# Altium PCB t40MCUPCB.PcbDoc
Units mil, origin at the board's own origin, x right, y up, seen from the top; angles counter-clockwise.
Board outline 3450 x 4000 mil, 4 copper layers (Top Layer, GND, VDD, Bottom Layer), stack 33.556 mil thick; 49 components, 37 nets, 221 pads, 91 vias.
Unrouted connection lines stored in the file: 48.
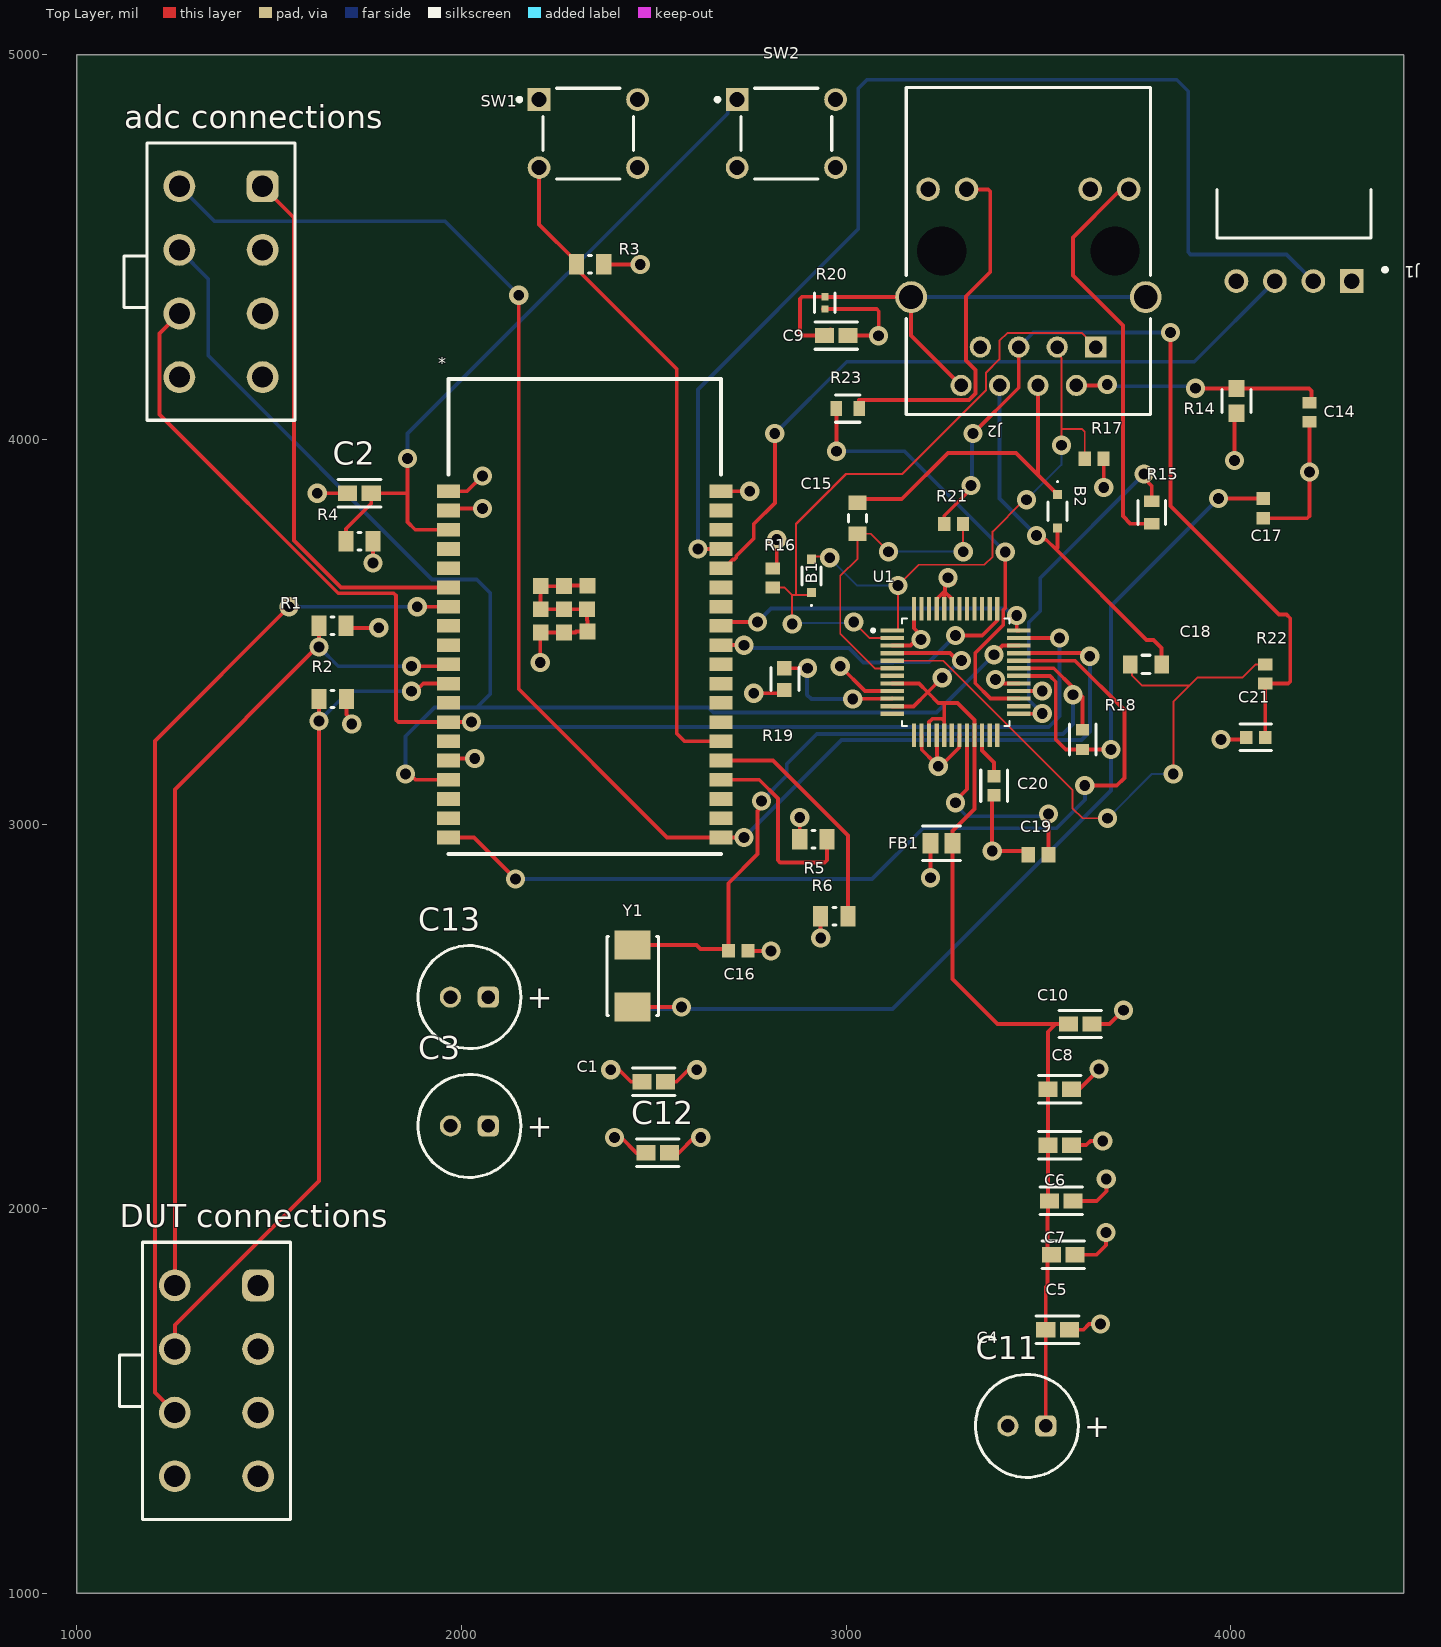
[diagram p0: Top Layer view]
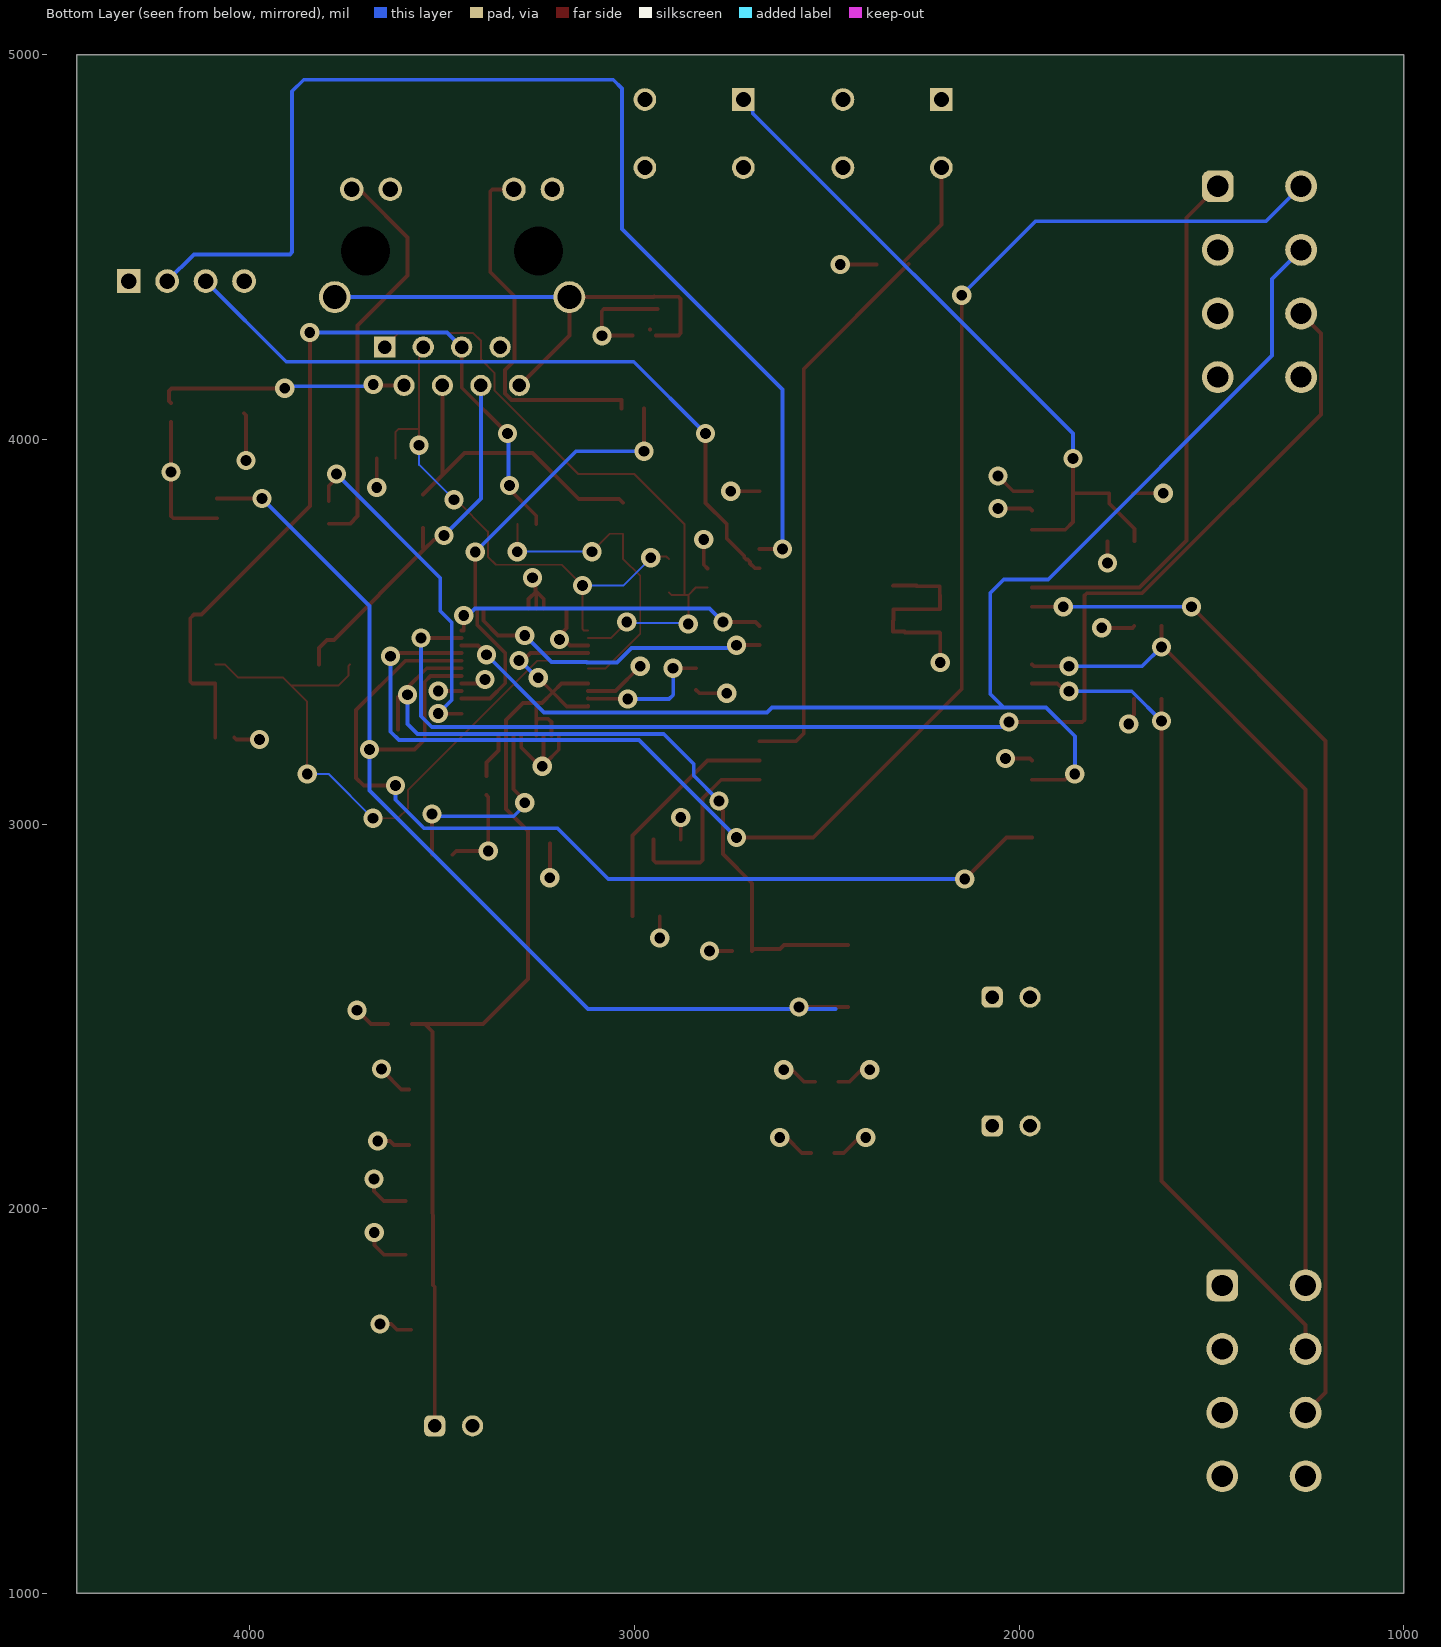
[diagram p1: Bottom Layer view, seen from below]
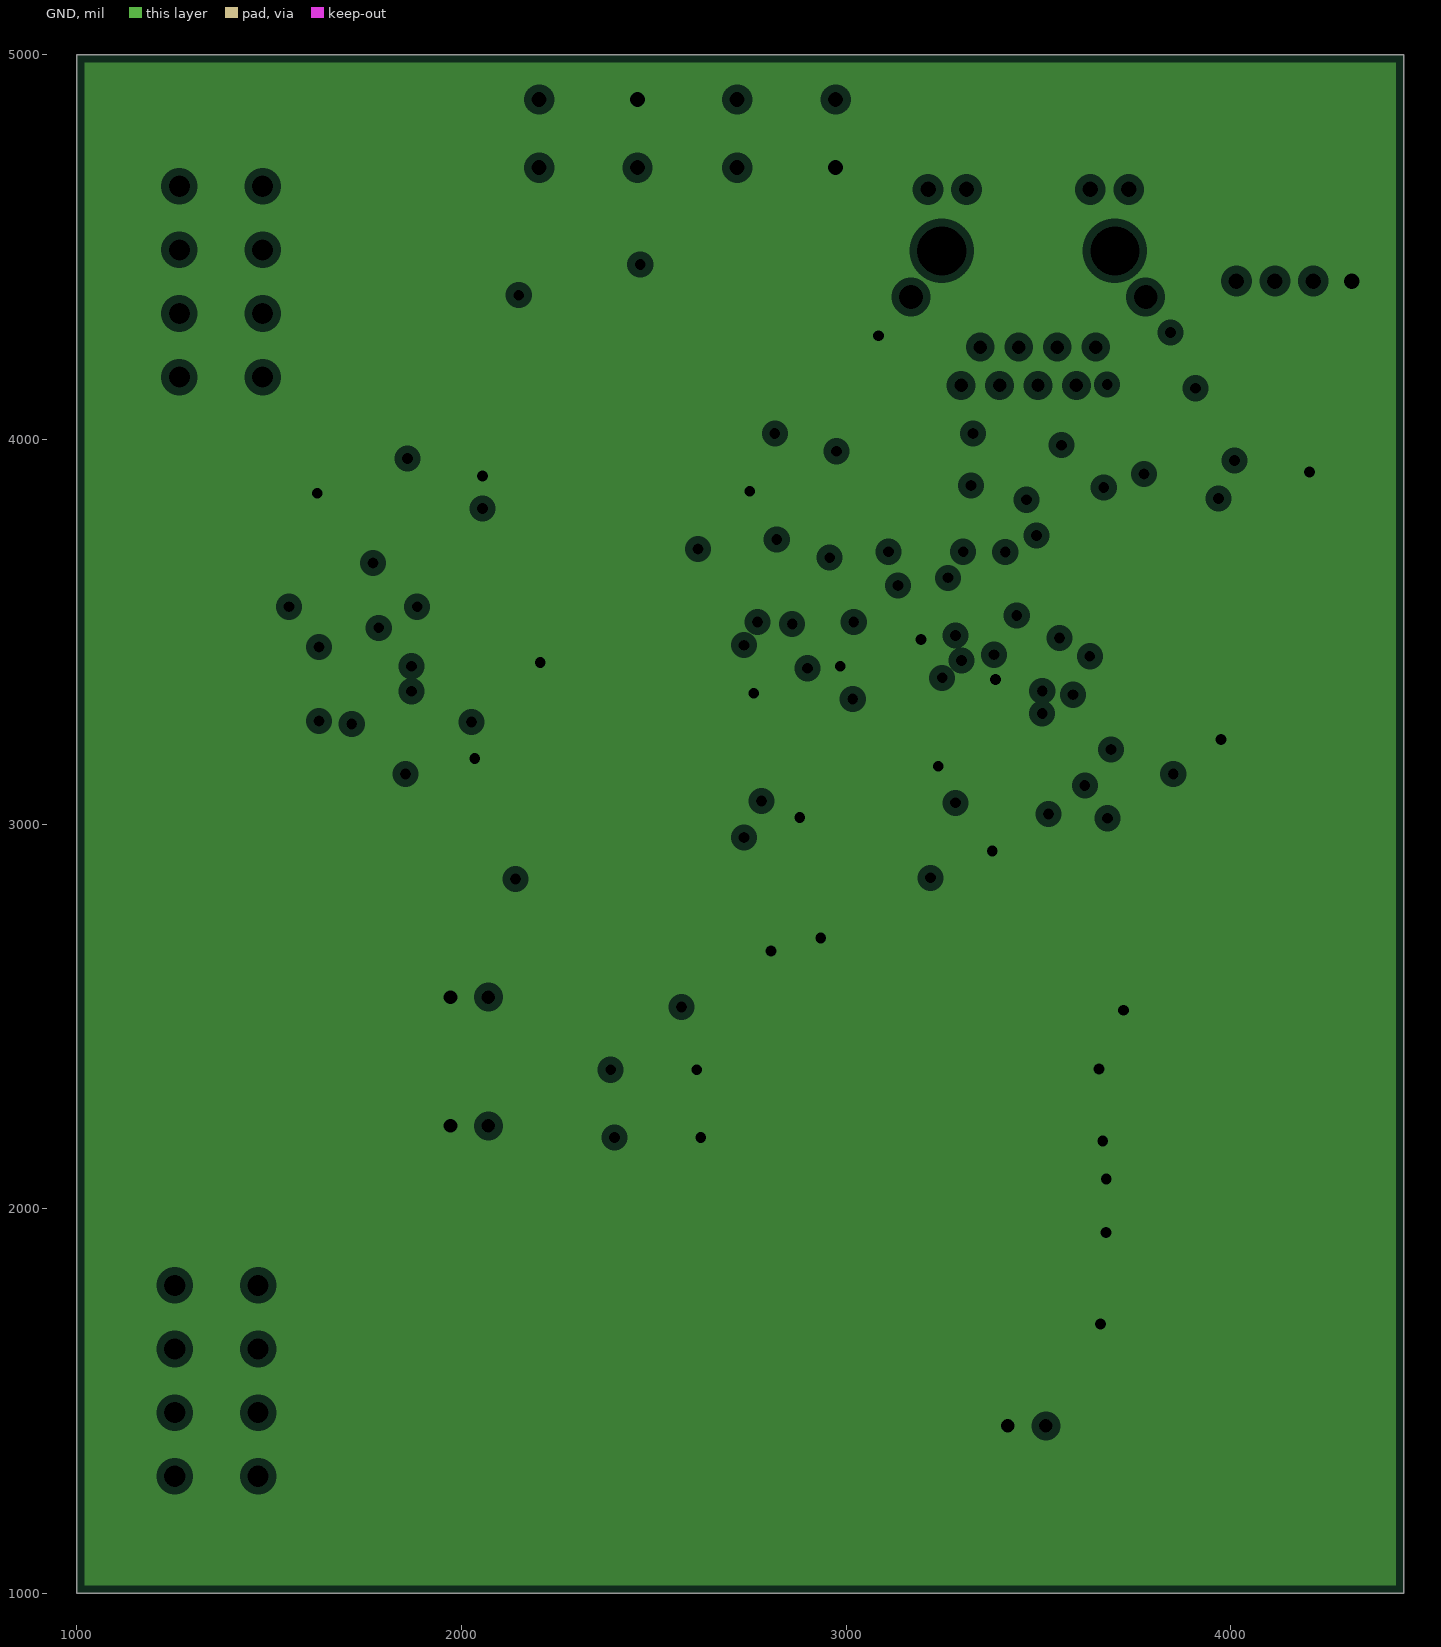
[diagram p2: GND, clearances drawn from the general rule]
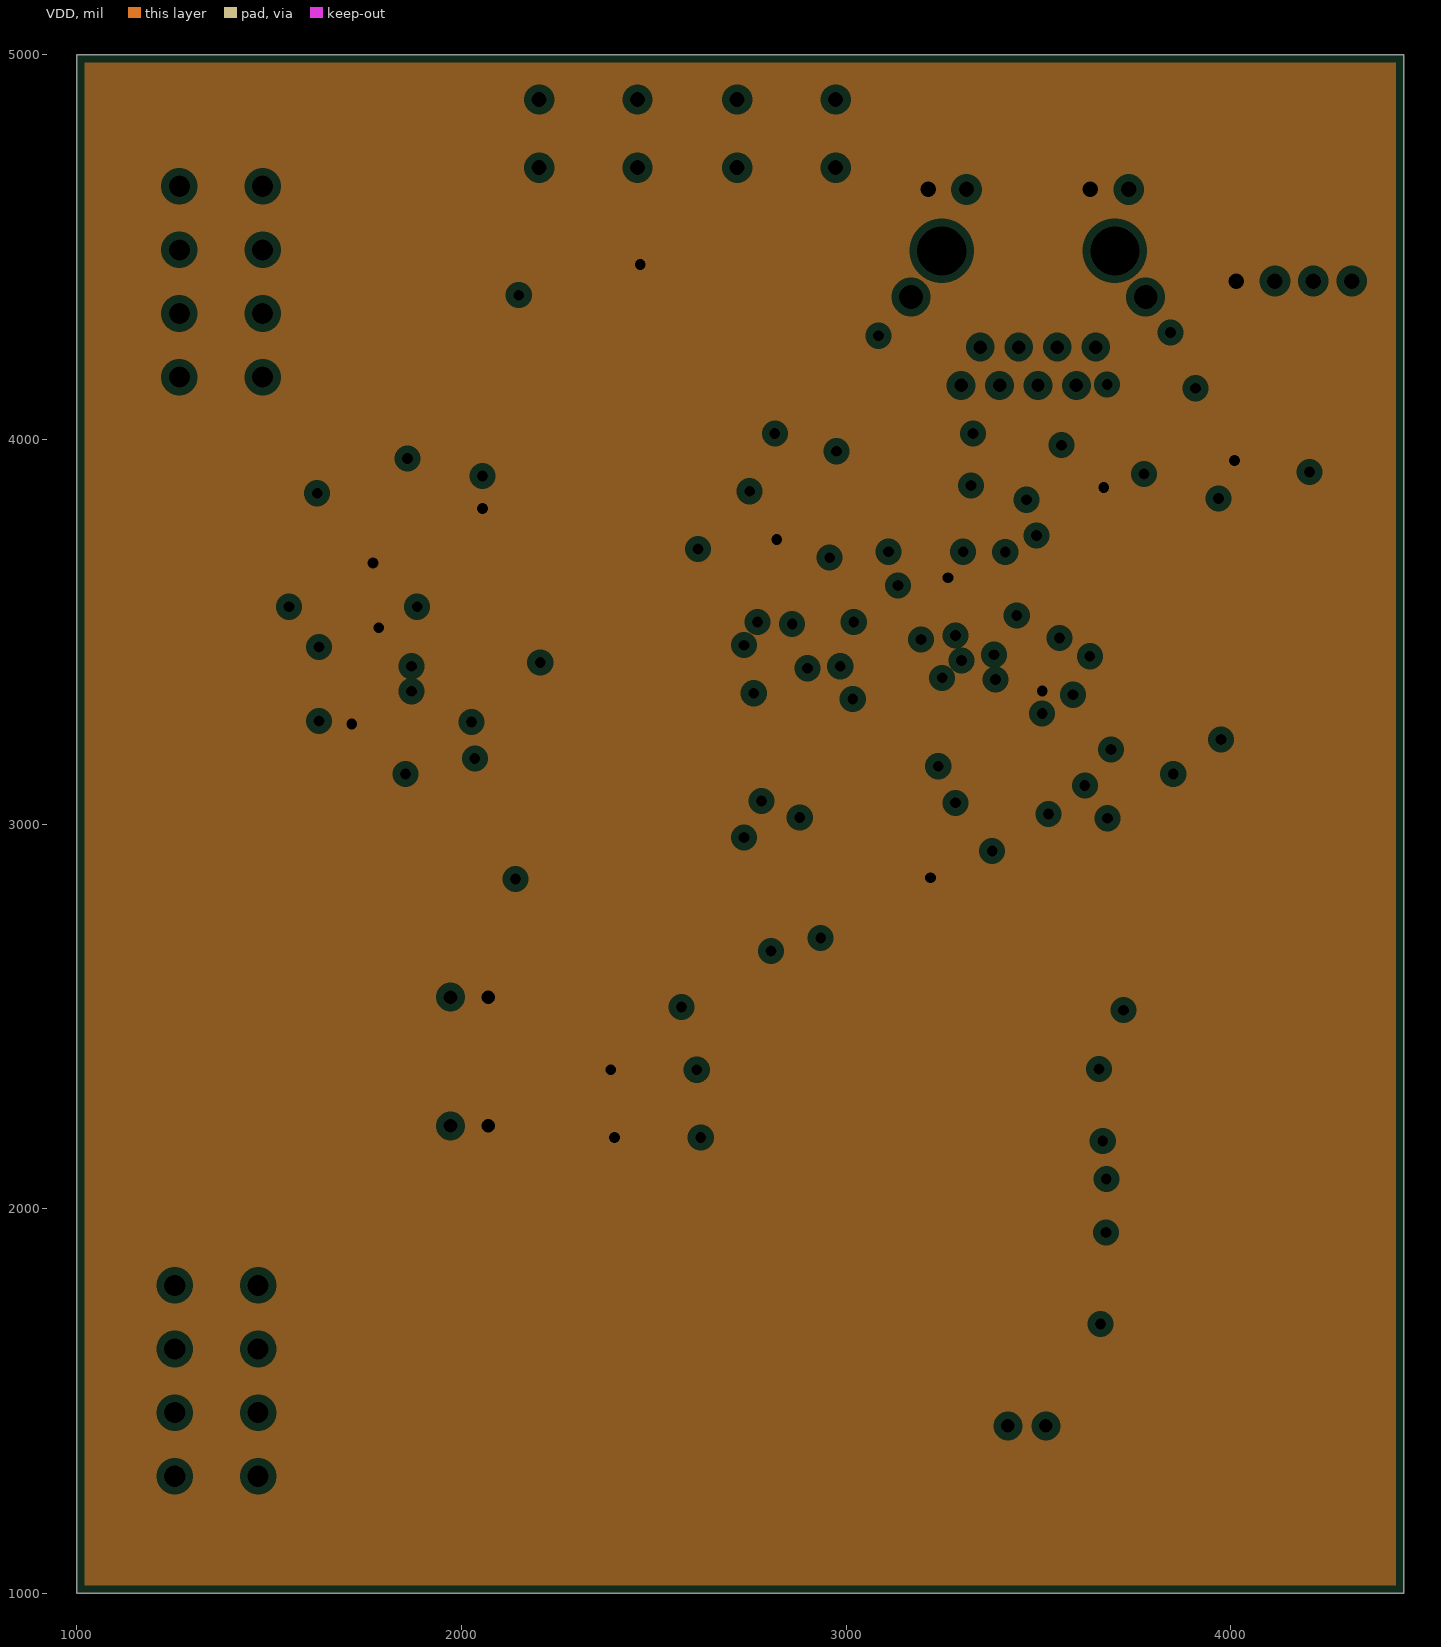
[diagram p3: VDD, clearances drawn from the general rule]
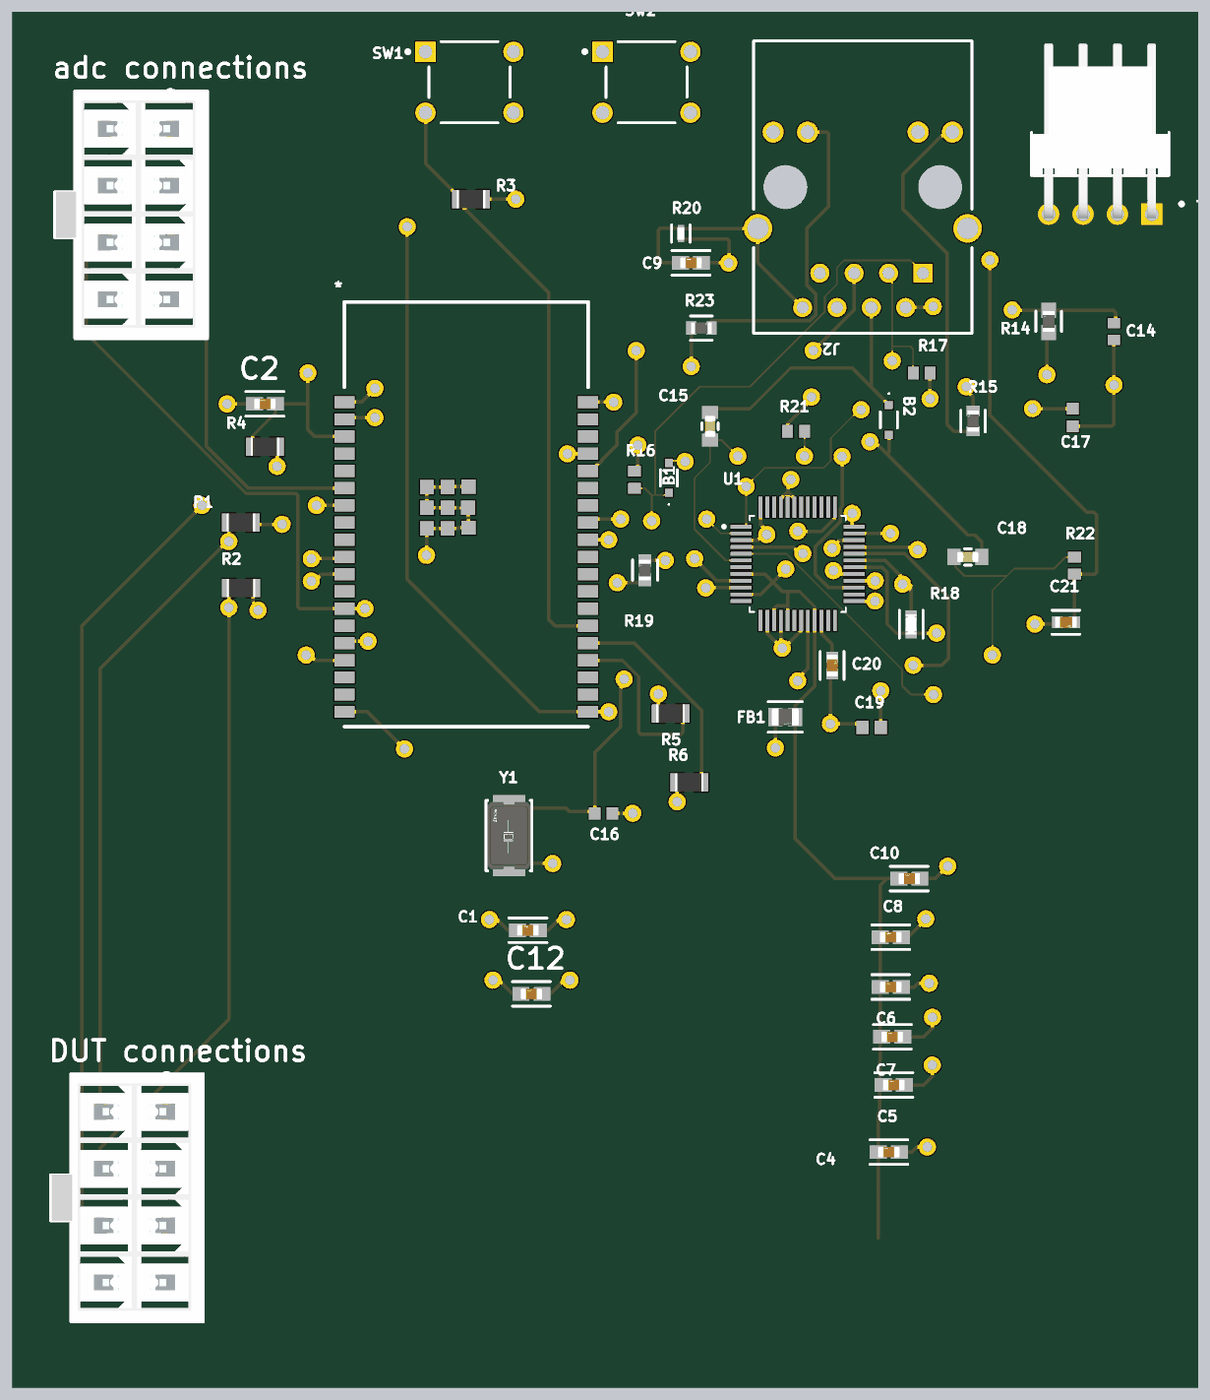
[diagram p4: 3D render of the assembled board from above, using the file's embedded part models]

## Layer stack, top to bottom
Top Solder: solder mask 0.4, Solder Resist, Dk 3.5
Top Layer: signal copper 1.4
Dielectric4: dielectric 12.6, FR-4, Dk 4.8
GND: plane copper 1.378, net GND
Dielectric 1: dielectric 12.6, FR-4, Dk 4.8
VDD: plane copper 1.378, net 3V3
Dielectric 3: prepreg 2.8, PP-006, Dk 4.1
Bottom Layer: signal copper 1.4
Bottom Solder: solder mask 0.4, Solder Resist, Dk 3.5

## Board outline
1000,1000 4450,1000 4450,5000 1000,5000

## Design rules (kind name [scope] priority, off if disabled: settings)
Clearance [All] p1: gap=5 ignorepadtopadclearanceinfootprint=FALSE
DiffPairsRouting [All] p1: maxlimit=10 minlimit=5 mostfreqgap=5 toplayer_minwidth=5 toplayer_maxwidth=20 toplayer_prefwidth=5 bottomlayer_minwidth=5 bottomlayer_maxwidth=20 bottomlayer_prefwidth=5 maxuncoupledlength=500
HoleSize [All] p1: absolutevalues=TRUE maxlimit=250 minlimit=10 maxpercent=80.000 minpercent=20.000
PlaneClearance [All] p1: clearance=20
PlaneConnect [All] p1: planeconnectstyle=Relief reliefexpansion=20 reliefentries=4 reliefconductorwidth=10 reliefairgap=10
PolygonConnect [All] p1: connectstyle=Relief reliefconductorwidth=10 reliefentries=4 polygonreliefangle="90 Angle" airgapwidth=10
RoutingVias [All] p1: holewidth=28 width=50 viastyle="Through Hole" minholewidth=28 minwidth=50 maxholewidth=28 maxwidth=50
SolderMaskExpansion [All] p1: expansion=4 istentingtop=FALSE
Width [All] p1: maxlimit=1000 minlimit=5 preferedwidth=10
26 further rules are at their usual default settings.

## Classes and differential pairs
differential pair ETH.TX: +ETH.TX_P -ETH.TX_N
differential pair ETH.RX: +ETH.RX_P -ETH.RX_N

## Components (designator, comment, footprint, x,y, rotation, side; value= is the part's Value field where it differs from the comment)
* "ESP 32 WROVER" PCBComponent_1 1966.34,3865 r0 top
"adc connections" "64900821122" 64900821122 1375,4410 r90 top
B1 "PESD5V0U1BA_115" PESD5V0U1BA115 2910,3645 r90 top
B2 "PESD5V0U1BA_115" PESD5V0U1BA115 3550,3813.31 r270 top
C1 "0.1 uF" FP-CC0603-DA-IPC_A 2500,2330 r0 top
C2 "0.1 uF" FP-CC0603-DA-IPC_A 1735,3860 r0 top
C3 "10 uF" WCAP-HTG5_D6.3H8 52020.79,52215 r0 top
C4 "0.1 uF" FP-CC0603-DA-IPC_A 3550,1685 r0 top
C5 "0.1 uF" FP-CC0603-DA-IPC_A 3564.41,1880 r0 top
C6 "0.1 uF" FP-CC0603-DA-IPC_A 3555.59,2165 r0 top
C7 "0.1 uF" FP-CC0603-DA-IPC_A 3560,2020 r0 top
C8 "0.1 uF" FP-CC0603-DA-IPC_A 3555.59,2310 r0 top
C9 "0.1 uF" FP-CC0603-DA-IPC_A 2974.41,4270 r0 top
C10 "0.1 uF" FP-CC0603-DA-IPC_A 3609.41,2480 r0 top
C11 "10 uF" WCAP-HTG5_D6.3H8 53470.2,51435.02 r0 top
C12 "0.1 uF" FP-CC0603-DA-IPC_A 2510.35,2145.03 r0 top
C13 "10 uF" WCAP-HTG5_D6.3H8 52020.79,52550 r0 top
C14 "0.022 uF" CAPC1608X92X38LL15T08 4205,4070.39 r90 top
C15 "6.8 nF" FP-CGA3E-0_3-0_1-IPC_A 3030,3795 r90 top
C16 "18 pF" CAPC1608X90X35LL15T15 2720,2670 r0 top
C17 "18 pF" CAPC1608X90X35LL15T15 4085,3820.59 r90 top
C18 "6.8 nF" FP-CGA3E-0_3-0_1-IPC_A 3780,3415 r0 top
C19 "4.7 uF" CAPC1608X87X35NL15T15 3500,2920 r0 top
C20 "10 nF" FP-0603-L_1_6_0_15-W_0_81-IPC_C 3385,3099.64 r90 top
C21 "10 nF" FP-0603-L_1_6_0_15-W_0_81-IPC_C 4065.36,3225.28 r0 top
"DUT connections" "64900821122" 64900821122 1363.27,1552.32 r90 top
FB1 "BLM21PG121SN1D" FP-BLM21-0_2-t0_85-e0_5-d-IPC_C 3248.57,2950 r0 top
J1 "22-05-3041" FP-22-05-3041-MFG 4165,4690 r180 top
J2 "SI-60062-F" BELF-SI-60062-F_V 3474.17,4490.16 r180 top
R1 "10 k" RESC2013X60X35NL10T20 1665,3515 r0 top
R2 "10 k" RESC2013X60X35NL10T20 1665.43,3325 r0 top
R3 "10 k" RESC2013X60X35NL10T20 2334.57,4455 r0 top
R4 "10 k" RESC2013X60X35NL10T20 1735,3735 r0 top
R5 "10 k" RESC2013X60X35NL10T20 2915,2960 r0 top
R6 "10 k" RESC2013X60X35NL10T20 2969.57,2760 r0 top
R14 "10" FP-CRCW0603-e3-IPC_A 4015,4100 r90 top
R15 "150" FP-CRCW0603-e3-MFG 3795,3810 r90 top
R16 "49.9" RESC1609X50X30NL10T20 2810,3639.61 r90 top
R17 "49.9" RESC1609X50X30NL10T20 3645.39,3950 r0 top
R18 "1 M" FP-ERJ3EK-IPC_C 3615,3219.38 r90 top
R19 "12.4 k" FP-CRCW0603-e3-IPC_B 2840,3376.83 r90 top
R20 "0" FP-CRCW0402-e3-IPC_C 2945,4355 r90 top
R21 "49.9" RESC1609X50X30NL10T20 3280,3780 r0 top
R22 "49.9" RESC1609X50X30NL10T20 4090,3390 r90 top
R23 "150" FP-CRCW0603-e3-MFG 3004.53,4080 r0 top
SW1 "1825910-6" TECO-1825910-6_V 2330,4795 r0 top
SW2 "1825910-6" TECO-1825910-6_V 2845,4795 r0 top
U1 "W5500" QFP50P900X900X160-48N 3285,3395 r0 top
Y1 "25 MHz" FP-ABM3-MFG 2445,2605 r90 top

## Footprints (in the part's own frame and the unit in brackets; to place one, negate y for a bottom-side part, rotate by r counter-clockwise, add the part's x,y. Pads: shape width x height; smd on the part's side, far side on the other; paste and mask are expansions set on the pad)
64900821122 [mm] "4.20mm Male Dual Row Vertical Header, 8p"
  rrect50% 2.1x2.1 hole 1.4: 1(6.3,-2.75)
  round 2.1 hole 1.4: 2(2.1,-2.75) 3(-2.1,-2.75) 4(-6.3,-2.75) 5(6.3,2.75) 6(2.1,2.75) 7(-2.1,2.75) 8(-6.3,2.75)
  silkscreen extent -9.15,-4.9 9.15,6.4, body extent -9.05,-4.8 9.35,6.3, height 12.85
BELF-SI-60062-F_V [mm] "MagJack, 14-Leads, Body 21.59x16.13mm"
  rect 1.4x1.4 hole 0.89: 1(-4.445,6.35)
  round 1.4 hole 0.89: 2(-3.175,8.89) 3(-1.905,6.35) 4(3.175,6.35) 5(-0.635,8.89) 6(0.635,6.35) 7(1.905,8.89) 8(4.445,8.89)
  round 1.55 hole 1.02: 9(-6.625,-4.06) 10(-4.085,-4.06) 11(4.085,-4.06) 12(6.625,-4.06)
  round 2.95 hole 3.25 unplated: MH1(-5.715,0) MH2(5.715,0)
  round 2.1 hole 1.57: S1(-7.745,3.05) S2(7.745,3.05)
  silkscreen extent -8.07,-10.79 8.07,10.8, body extent -8.06,-10.79 8.06,10.8, height 13.84
CAPC1608X87X35NL15T15 [mm] "Chip Capacitor, 2-Leads, Body 1.60x0.80mm, IPC Medium Density"
  rect 0.9x1 smd: 1(-0.675,0) 2(0.675,0)
  body extent -0.87,-0.48 0.87,0.47, height 0.87
CAPC1608X90X35LL15T15 [mm] "Chip Capacitor, 2-Leads, Body 1.60x0.81mm, IPC High Density"
  rect 0.85x0.9 smd: 1(-0.65,0) 2(0.65,0)
  body extent -0.88,-0.48 0.87,0.48, height 0.9
CAPC1608X92X38LL15T08 [mm] "Chip Capacitor, 2-Leads, Body 1.60x0.80mm, IPC High Density"
  rect 0.75x0.9 smd: 1(-0.625,0) 2(0.625,0)
  body extent -0.87,-0.48 0.87,0.48, height 0.92
FP-22-05-3041-MFG [mm]
  rect 1.57x1.57 hole 1.02 paste-2539.97 mask+0: 1(-3.81,7.072)
  round 1.57 hole 1.02 paste-2539.97 mask+0: 2(-1.27,7.072) 3(1.27,7.072) 4(3.81,7.072)
  silkscreen extent -6.13,1.03 5.08,6.44, body extent -5.18,-6.28 5.18,7.96, height 0.25
FP-0603-L_1_6_0_15-W_0_81-IPC_C [mil]
  rect 31.75x34.18 smd paste+0 mask+0: 1(-24.64,0) 2(24.64,0)
  silkscreen extent -41,-35 41,35, body extent -44,-23 44,23, height 10
FP-ABM3-MFG [mm]
  rect 1.9x2.4 smd paste+0 mask+0: 1(-2.05,0) 2(2.05,0)
  silkscreen extent -2.6,-1.7 2.6,1.7, body extent -3.1,-1.8 3.1,1.8, height 0.25
FP-BLM21-0_2-t0_85-e0_5-d-IPC_C [mil]
  rect 41.53x53.39 smd paste+0 mask+0: 1(-28.57,0) 2(28.57,0)
  silkscreen extent -49,-44 49,44, body extent -53,-32 53,32, height 10
FP-CC0603-DA-IPC_A [mil]
  rect 49.53x39.85 smd paste+0 mask+0: 1(-30.59,0) 2(30.59,0)
  silkscreen extent -55,-36 55,36, body extent -75,-40 75,40, height 10
FP-CGA3E-0_3-0_1-IPC_A [mm]
  rect 0.956x1.206 smd paste+0 mask+0: 1(-1.025,0) 2(1.025,0)
  silkscreen extent -0.25,-0.6 0.25,0.6, body extent -2,-1.1 2,1.1, height 0.25
FP-CRCW0402-e3-IPC_C [mil]
  rect 18.43x18.6 smd paste+0 mask+0: 1(-15.83,0) 2(15.83,0)
  silkscreen extent -25,-27 25,27, body extent -29,-15 29,15, height 10
FP-CRCW0603-e3-IPC_A [mil]
  rect 44.69x41.82 smd paste+0 mask+0: 1(-32.1,0) 2(32.1,0)
  silkscreen extent -30,-37 30,37, body extent -74,-41 74,41, height 10
FP-CRCW0603-e3-IPC_B [mil]
  rect 36.81x37.88 smd paste+0 mask+0: 1(-28.17,0) 2(28.17,0)
  silkscreen extent -30,-37 30,35, body extent -56,-29 56,29, height 10
FP-CRCW0603-e3-MFG [mm]
  rect 0.75x1 smd paste+0 mask+0: 1(-0.75,0) 2(0.75,0)
  silkscreen extent -0.8,-0.9 0.8,0.9, body extent -1.22,-0.6 1.22,0.6, height 0.25
FP-ERJ3EK-IPC_C [mil]
  rect 29.78x33.94 smd paste+0 mask+0: 1(-25.62,0) 2(25.62,0)
  silkscreen extent -41,-34 41,34, body extent -44,-23 44,23, height 10
PCBComponent_1 [mm]
  rect 1.5x0.9 smd: 1(0,0) 2(0,-1.27) 3(0,-2.54) 4(0,-3.81) 5(0,-5.08) 6(0,-6.35) 7(0,-7.62) 8(0,-8.89) 9(0,-10.16) 10(0,-11.43) 11(0,-12.7) 12(0,-13.97) 13(0,-15.24) 14(0,-16.51) 15(0,-17.78) 16(0,-19.05) 17(0,-20.32) 18(0,-21.59) 19(0,-22.86) 20(18,-22.86) 21(18,-21.59) 22(18,-20.32) 23(18,-19.05) 24(18,-17.78) 25(18,-16.51) 26(18,-15.24) 27(18,-13.97) 28(18,-12.7) 29(18,-11.43) 30(18,-10.16) 31(18,-8.89) 32(18,-7.62) 33(18,-6.35) 34(18,-5.08) 35(18,-3.81) 36(18,-2.54) 37(18,-1.27) 38(18,0)
  rect 1.05x1.05 smd: 39(6.095,-9.315) 39(6.095,-7.79) 39(6.095,-6.265) 39(7.62,-9.315) 39(7.62,-7.79) 39(7.62,-6.265) 39(9.145,-7.79) 39(9.177,-9.268) 39(9.177,-6.24)
  silkscreen extent 0,-23.96 18,7.41
PESD5V0U1BA115 [mm]
  rect 0.6x0.6 smd: 1(-1.1,0) 2(1.1,0)
  silkscreen extent -2,-0.62 0.6,0.62
QFP50P900X900X160-48N [mm]
  rect 1.56x0.28 smd: 1(-4.18,2.75) 2(-4.18,2.25) 3(-4.18,1.75) 4(-4.18,1.25) 5(-4.18,0.75) 6(-4.18,0.25) 7(-4.18,-0.25) 8(-4.18,-0.75) 9(-4.18,-1.25) 10(-4.18,-1.75) 11(-4.18,-2.25) 12(-4.18,-2.75) 25(4.18,-2.75) 26(4.18,-2.25) 27(4.18,-1.75) 28(4.18,-1.25) 29(4.18,-0.75) 30(4.18,-0.25) 31(4.18,0.25) 32(4.18,0.75) 33(4.18,1.25) 34(4.18,1.75) 35(4.18,2.25) 36(4.18,2.75)
  rect 0.28x1.56 smd: 13(-2.75,-4.18) 14(-2.25,-4.18) 15(-1.75,-4.18) 16(-1.25,-4.18) 17(-0.75,-4.18) 18(-0.25,-4.18) 19(0.25,-4.18) 20(0.75,-4.18) 21(1.25,-4.18) 22(1.75,-4.18) 23(2.25,-4.18) 24(2.75,-4.18) 37(2.75,4.18) 38(2.25,4.18) 39(1.75,4.18) 40(1.25,4.18) 41(0.75,4.18) 42(0.25,4.18) 43(-0.25,4.18) 44(-0.75,4.18) 45(-1.25,4.18) 46(-1.75,4.18) 47(-2.25,4.18) 48(-2.75,4.18)
  silkscreen extent -5.55,-3.55 3.55,3.55
RESC1609X50X30NL10T20 [mm] "Chip Resistor, 2-Leads, Body 1.55x0.85mm, IPC Medium Density"
  rect 0.8x0.95 smd: 1(-0.625,0) 2(0.625,0)
  body extent -0.82,-0.48 0.82,0.48, height 0.5
RESC2013X60X35NL10T20 [mm] "Chip Resistor, 2-Leads, Body 2.1x1.35mm, IPC Medium Density"
  rect 1x1.35 smd: 1(-0.9,0) 2(0.9,0)
  silkscreen extent -0.1,-0.58 0.1,0.58, body extent -1.05,-0.68 1.05,0.67, height 0.6
TECO-1825910-6_V [mm] "Switch, 4-Leads, Body 5.99x5.99mm"
  rect 1.5x1.5 hole 0.99: 1(-3.25,2.25)
  round 1.5 hole 0.99: 2(3.25,2.25) 3(-3.25,-2.25) 4(3.25,-2.25)
  silkscreen extent -4.67,-3 3,3, body extent -3,-2.99 2.99,3, height 5
WCAP-HTG5_D6.3H8 [mm] "Aluminum Hybrid Polymer Capacitor, diameter 6.30 mm"
  rrect50% 1.4x1.4 hole 0.9: 1(-1268.75,-1270)
  round 1.4 hole 0.9: 2(-1271.25,-1270)
  silkscreen extent -1273.4,-1273.4 -1266.6,-1266.6, body extent -1273.15,-1273.14 -1266.85,-1266.86, height 8.09

## Part data
"adc connections" "DUT connections": library part CMP-1502-00496-2, Color=White, Contact Resistance=10mΩ, Current Rating=7A, Flammability Rating="UL94 V-0", Insulation Resistance=1GΩ, Max Operating Temperature=105°C, Min Operating Temperature=-40°C, Operating Supply Voltage=600V, Connector Type="Male Pin, Socket", Contact Gender=Male, Contact Material=Copper, Contact Plating=Tin, Fastening Type=Ramp, Gender=Male, Height=9.6mm, Housing Material=Nylon, Insulation=Insulated, Lead Pitch=4.2mm, Length=18mm, Mount="Through Hole", NexarPartId=8917581, Number Of Contacts=8, Number of Pins=8, Number of Positions=8, Number Of Rows=2, Orientation=Vertical, Pitch=4.2mm, REACH SVHC=Unknown, RoHS=Compliant, Row Spacing=5.5118mm, Termination="Through Hole", Voltage Rating=600V, Width=18.1mm
B1 B2: "PESDV0U1BA - Low capacitance bidirectional ESD protection diode", Manufacturer_Name=Nexperia, Manufacturer_Part_Number=PESD5V0U1BA,115, Mouser Part Number=771-PESD5V0U1BA115, Datasheet Link=https://assets.nexperia.com/documents/data-sheet/PESD5V0U1BA.pdf, Geometry.Height=1.1mm, Mouser Price/Stock=https://www.mouser.co.uk/ProductDetail/Nexperia/PESD5V0U1BA115?qs=LOCUfHb8d9tqw6h%2FD3HZHw%3D%3D
C1 C2 C4 C5 C6 C7 C8 C9 C10 C12: library part CMP-03422-001490-1, "CAP CER 0.1UF 50V X7R 0603 CC0603JRX7R9BB104", Capacitance=100nF, Case Code (Imperial)=0603, Case Code (Metric)=1608, Dielectric=X7R, Max Operating Temperature=125°C, Min Operating Temperature=-55°C, Resistor Type=Ceramic, Tolerance=5%, Voltage Rating=50V, Case/Package=0603, Construction=Flat, Depth=0.8mm, Halogen Free="Halogen Free", Height=0.8mm, Lead Free="Lead Free", Length=1.6mm, Mount="Surface Mount", Number of Pins=2, Packaging="Tape and Reel", Radiation Hardening=No, RoHS Compliant=Yes, Series=CC, Termination=SMD/SMT, Thickness=0.035inch, Voltage Rating (DC)=50V, Weight=7.1E-05oz, Width=0.031inch
C3 C11 C13: library part CMP-03913-134709123-1, "870575873001 Cap, 10Uf, 63V, Alu Elec, Hybrid, Rad Rohs Compliant: Yes 870575873001", Capacitance=10µF, ESR (Equivalent Series Resistance)=100mΩ, Leakage Current=6.3µA, Max Operating Temperature=105°C, Min Operating Temperature=-55°C, Ripple Current=1.06A, Voltage Rating=63V, Diameter=6.3mm, Hole Diameter=900µm, Length=8mm, NexarPartId=134709123, Pitch=2.5mm, RoHS=Compliant
C14: library part CMP-2006-01328-1, "VJ0603Y223JXAAC", Manufacturer=Vitramon, Part Number=VJ0603Y223JXAAC
C15 C18: library part CMP-08246-001772-1, "Cap Ceramic 6.8nF 50V C0G 5% Pad SMD 0603 +125°C Automotive T/R CGA3E2C0G1H682J080AE"
C16 C17: library part CMP-2006-04592-1, "06035A180FAT2A", Manufacturer="AVX Interconnect / Elco", Part Number=06035A180FAT2A
C19: library part CMP-2006-03238-1, "C0603C475K8PACTU", Manufacturer=Kemet, Part Number=C0603C475K8PACTU
C20 C21: library part CMP-2006-02076-2, "CAP CER 10000PF 50V X7R 0603 06035C103KAT4A", Capacitance=10nF, Case Code (Imperial)=0603, Case Code (Metric)=1608, Dielectric=X7R, Insulation Resistance=100GR, Max Operating Temperature=125°C, Min Operating Temperature=-55°C, Package Quantity=15000, Tolerance=10%, Voltage=50V, Case/Package=0603, Construction=Flat, Depth=0.81mm, Dissipation Factor=2.5%, Height=0.9mm, Lead Free="Lead Free", Length=1.6mm, Mount="Surface Mount", Number of Pins=2, Packaging="Tape and Reel", Radiation Hardening=No, REACH SVHC="No SVHC", RoHS Compliant=Yes, Series=-, Termination=SMD/SMT, Voltage Rating=50V, Voltage Rating (DC)=50V, Width=0.81mm
FB1: library part CMP-0686-00612-3, "Chip Ferrite Bead, 0805, 120Ω @ 100MHz, 0.03Ω, 25%, 3A", Case Code (Imperial)=0805, Case Code (Metric)=2012, Current Rating=3A, DC Resistance (DCR)=30mR, Max Operating Temperature=125°C, Min Operating Temperature=-55°C, Package Quantity=1, Test Frequency=100MHz, Tolerance=25%, Case/Package=0805, DC Resistance-Max=30mR, Depth=1.25mm, Height=0.85mm, Impedance=120R, Lead Free="Lead Free", Length=2mm, Material=Steel, Max Current Rating=3A, Max DC Current=3A, Number of Circuits=1, Number of Lines=1, Number of Pins=2, Packaging="Tape and Reel", REACH SVHC="No SVHC", RoHS Compliant=Yes, Series=BLM21P, Termination=SMD/SMT, Width=1.25mm
J1: library part CMP-2000-05533-2, "CONN HEADER R/A 4POS 2.54MM", Current Rating=4A, Manufacturer=Molex, Package=0, Temperature="-40°C to +80°C", Temperature Range High=+80°C, Temperature Range Low=-40°C, Voltage Rating=500V, Automotive=No, Category=Conn, ComponentLink2Description=Datasheet, ComponentLink2URL=https://www.molex.com/webdocs/datasheets/pdf/en-us/0022053041_PCB_HEADERS.pdf, Conn Gender=Male, Conn Orientation="Right Angle", Contact Material=Tin,Nickel, Device Class L1=Connectors, Device Class L2="Headers and Wire Housings", Device Class L3=unset, Digikey Description="CONN HEADER R/A 4POS 2.54MM", Footprint Url=https://www.molex.com/pdm_docs/sd/022053041_sd.pdf, Height=6.6mm, Lead Free=Yes, Manufacturer Part Number=22-05-3041, Number Of Contacts=4, Number Of Rows=1, Octopart=https://octopart.com/22-05-3041-molex-2579, Pitch=2.54mm, RoHS=TRUE
J2: library part CMP-2000-07059-1, "1 Port RJ45 Magjack Connector with Yellow and Green LED, 10/100 Base-T, 12-Pin THD, RoHS, Tray", Manufacturer="Bel Fuse", Package Description="12-Pin Through Hole Device, Body 21.59 x 16.13 mm", Connector Type=RJ45, Contact Material=CopperAlloy, Contact Plating=Gold, Datasheet URL=http://belfuse.com/pdfs/SI-60062-F.pdf, Datasheet Version="Rev. B0, 09/2008", Depth=21.59mm, Gender=Female, Length=15.21mm, Manufacturer URL=http://belfuse.com/, Mounting Technology=ThroughHole, Mounting Type=ThroughHole, Number of Ways=8P4C, Orientation=Straight, Package Reference=SI-60062-F, Series=MagJack, Shield Type=STP, Width=17.98mm
R1 R2 R3 R4 R5 R6: library part CMP-1659-00013-4, "Chip Resistor, 10 KOhm, +/- 1%, 0.125 W, -55 to 155 degC, 0805 (2012 Metric), RoHS, Tape and Reel RC0805FR-0710KL", Manufacturer=Yageo, Max Operating Temperature="155 degC", Min Operating Temperature="-55 degC", Package Quantity=5000, Voltage Rating="150 V", ComponentLink1Description="Manufacturer URL", ComponentLink1URL=http://www.yageo.com/, ComponentLink2Description=Datasheet, ComponentLink2URL=http://www.yageo.com/documents/recent/PYu-RC_Group_51_RoHS_L_04.pdf, DatasheetVersion="Rev. 4, 02/2016", Height="0.5 mm", Length="2 mm", Mount="Surface Mount", Mounting Technology="Surface Mount", PackageDescription="2-Pin Surface Mounted Device, Body 2 x 1.25 mm", PackageReference=0805, Packaging="Tape and Reel", Pins=2, REACH SVHC="No SVHC", RoHSCompliant=true
R14: library part CMP-2000-03845-2, "RES Thick Film, 10Ω, 1%, 0.1W, 100ppm/°C, 0603 CRCW060310R0FKEA", Case Code (Imperial)=0603, Case Code (Metric)=1608, Max Operating Temperature=155°C, Max Power Dissipation=100mW, Min Operating Temperature=-55°C, Resistance=10R, Temperature Coefficient=100ppm/°C, Tolerance=1%, Voltage Rating=75V, Case/Package=0603, Composition="Thick Film", Contact Plating=Tin, Depth=0.85mm, Features="Automotive AEC-Q200", Height=0.45mm, Lead Free="Lead Free", Length=1.55mm, Military Standard=Not, Mount="Surface Mount", Number of Pins=2, Number of Terminations=2, Package Quantity=10, Packaging="Tape and Reel", Power Rating=100mW, Termination=SMD/SMT, Voltage Rating (DC)=75V, Weight=7.1E-05oz, Width=0.033inch
R15 R23: library part CMP-2000-03913-2, "RES Thick Film, 150Ω, 1%, 0.1W, 100ppm/°C, 0603 CRCW0603150RFKEA", Case Code (Imperial)=0603, Case Code (Metric)=1608, Max Operating Temperature=155°C, Max Power Dissipation=100mW, Min Operating Temperature=-55°C, Package Quantity=10, Resistance=150R, Temperature Coefficient=100ppm/°C, Tolerance=1%, Voltage Rating=75V, Case/Package=0603, Composition="Thick Film", Contact Plating=Tin, Depth=0.85mm, Features="Automotive AEC-Q200", Height=0.45mm, Lead Free="Lead Free", Length=1.55mm, Military Standard=Not, Mount="Surface Mount", Number of Terminations=2, Packaging="Tape and Reel", Power Rating=100mW, Radiation Hardening=No, Termination=SMD/SMT, Voltage Rating (DC)=75V, Weight=7.1E-05oz, Width=0.033inch
R16 R17 R21 R22: library part CMP-2000-03399-1, "CRCW060349R9FKEC 0603 49.9 ohm Resistor", Manufacturer="Vishay Dale", Part Number=CRCW060349R9FKEC
R18: library part CMP-1012-00849-3, "RES SMD 1M OHM 1% 1/10W 0603 ERJ-3EKF1004V", Case Code (Imperial)=0603, Case Code (Metric)=1608, Max Operating Temperature=155°C, Max Power Dissipation=100mW, Min Operating Temperature=-55°C, Package Quantity=1, Resistance=1MR, Resistance Tolerance=1%, Resistor Type="Thick Film", Temperature Coefficient=100ppm/°C, Voltage Rating=75V, Case/Package=0603, Construction=Rectangular, Contact Plating=Tin, Depth=0.8mm, Features="Automotive AEC-Q200", Height=0.022inch, Lead Free="Lead Free", Length=1.6mm, Military Standard=Not, Mount="Surface Mount", Number of Pins=2, Number of Terminations=2, Packaging="Tape and Reel", Power Rating=100mW, Radiation Hardening=No, REACH SVHC="No SVHC", RoHS Compliant=Yes, Series=ERJ, Size Code=0603, Termination=SMD/SMT, Tolerance=1%, Voltage Rating (DC)=75V, Width=0.8mm
R19: library part CMP-2000-03881-2, "RES Thick Film, 12.4kΩ, 1%, 0.1W, 100ppm/°C, 0603 CRCW060312K4FKEA", Case Code (Imperial)=0603, Case Code (Metric)=1608, Max Operating Temperature=155°C, Max Power Dissipation=100mW, Min Operating Temperature=-55°C, Package Quantity=10, Resistance=12.4kR, Temperature Coefficient=100ppm/°C, Tolerance=1%, Voltage Rating=75V, Case/Package=0603, Composition="Thick Film", Contact Plating=Tin, Depth=0.85mm, Features="Automotive AEC-Q200", Height=0.45mm, Lead Free="Lead Free", Length=1.55mm, Military Standard=Not, Mount="Surface Mount", Number of Pins=2, Number of Terminations=2, Packaging="Tape and Reel", Power Rating=100mW, Radiation Hardening=No, Termination=SMD/SMT, Voltage Rating (DC)=75V, Weight=7.1E-05oz, Width=0.85mm
R20: library part CMP-2002-08122-2, "RES Thick Film, 0Ω, 0.063W, 0402 CRCW04020000Z0ED", Case Code (Imperial)=0402, Case Code (Metric)=1005, Max Operating Temperature=155°C, Max Power Dissipation=63mW, Min Operating Temperature=-55°C, Package Quantity=1, Resistance=0mR, Temperature Coefficient=100ppm/°C, Tolerance=5%, Voltage Rating=50V, Case/Package=0402, Composition="Thick Film", Contact Plating=Tin, Depth=0.5mm, Features="Automotive AEC-Q200", Height=0.35mm, Lead Free="Lead Free", Length=1mm, Military Standard=Not, Mount="Surface Mount", Number of Terminations=2, Packaging="Tape and Reel", Power Rating=63mW, Radiation Hardening=No, Termination=SMD/SMT, Voltage Rating (DC)=50V, Weight=2.3E-05oz, Width=0.5mm
SW1 SW2: library part CMP-1684-00021-1, "Tact Switch, SPST-NO, 0.05 A, -35 to 85 degC, 4-Pin THD, RoHS, Bulk", Actuator Color=Black, Contact Rating @ Voltage=0.05A@24VDC, Dielectric Strength=500VAC, Manufacturer="TE Connectivity", Maximum AC Voltage Rating=N/A, Maximum Contact Resistance=100mOhm, Maximum DC Voltage Rating=24V, Minimum Insulation Resistance=100MOhm, Operating Temperature=-35to85C, Package Description="4-Pin Through Hole Device, Body 5.99 x 5.99 mm, Pitch 6.5 mm", Package Reference=THD, Actuator Length=1.4mm, Actuator Material=PolybutyleneTerephthalate, Actuator Style=RoundButton, Base Material=N/A, Body Orientation=Straight, Bushing Type=Unthreaded, Contact Material=CopperAlloy, Contact Plating=Silver, Datasheet URL=http://www.te.com/commerce/DocumentDelivery/DDEController?Action=showdoc&DocId=Customer+Drawing%7F1825910%7FC9%7Fpdf%7FEnglish%7FENG_CD_1825910_C9.pdf%7F1825910-6, Datasheet Version="Rev. C9", Dimension=5.99x5mm, Electrical Life=100000Cycles, Family=1825910, Function=MomentaryContact, Housing Material=N/A, Illumination=N/R, Manufacturer URL=http://www.te.com, Mechanical Life=100000Cycles, Mounting=ThroughHole, Packaging=N/A, Part No=1825910-6, Pole Throw Configuration=SPST, Product Weight=N/A, RoHS=Yes, Seal Description=N/A, Seal Location=N/A, Switch Configuration=OFF(ON), Terminal Type=PCPins, Thread Size=N/R
U1: "Hardwired TCP/IP embedded Ethernet controller", Package=None, Availability=Unavailable, MP=W5500, Price=None
Y1: library part CMP-2000-05729-2, "Crystal 25MHz ±20ppm 18pF SMD-2 5mm x 3.2mm ABM3-25.000MHZ-B2-T", Case/Package=CSMD, ESR (Equivalent Series Resistance)=30R, Frequency=25MHz, Frequency Stability=50ppm, Frequency Tolerance=20ppm, Insulation Resistance=500MR, Load Capacitance=18pF, Max Operating Temperature=70°C, Min Operating Temperature=-20°C, Package Quantity=1000, Resistor Type=Ceramic, Depth=3.2mm, Height=0.051inch, Lead Free="Lead Free", Length=5mm, Mount="Surface Mount", Number of Pins=2, Operating Frequency="25 MHz", Packaging="Tape and Reel", REACH SVHC=Yes, RoHS Compliant=Yes, Series=ABM3, Series Resistance=30R, Termination=SMD/SMT, Tolerance=20ppm, Width=0.126inch

## Via types
v1: diameter 50, hole 28, Top Layer to Bottom Layer, 91 vias

## Nets (pads, with @x,y where several pads share a name; then routed paths per layer and width w, separated by ;. In a path a pad name is that pad's centre, name@x,y a point inside that pad or via, vN(x,y) a via of type N, cw(c..) or ccw(c..) an arc to the next point about the centre after c; other vN are vias at no path point)
3V3: *.2 C1.1 C3.1 C12.1 C13.1 FB1.1 J1.4 J2.10 J2.12 R1.2 R2.2 R3.2 R4.2 R14.1 R16.2 R17.2 U1.28 U1.43 U1.44 U1.45 | length 1234.2
  Top Layer w10: R1.2 1705.43,3510 v1(1785,3510) ; R2.2 1700.87,3284.34 1715,3270.2 v1(1715,3260) ; v1(1770.43,3678.42) R4.2 ; *.2 1971.34,3820 v1(2055,3820) ; R3.2 v1(2465,4455) ; v1(2388.07,2361) 2409.82,2361 2440.82,2330 C1.1 ; v1(2398.43,2185.03) 2415.68,2185.03 2455.68,2145.03 C12.1 ; R16.2 2820,3674.21 v1(2820,3740) ; v1(3220,2860) FB1.1 ; U1.45 3235.79,3584.76 3255.47,3604.45 ; U1.44 3255.47,3604.45 ; U1.43 3275.16,3584.76 3255.47,3604.45 ; v1@3280,3625 v1(3265,3640) 3257.35,3632.35 3257.35,3606.32 3255.47,3604.45 ; U1.28 v1(3510.28,3345.79) ; v1(3670,3875) R17.2 ; v1(4010,3945) 4010,4062.9 R14.1
ACTIVE: R23.1 U1.27 | length 1161.9
  Top Layer w10: v1(2975,3969) R23.1 ; v1(3414,3707) 3414,3561.72 3408.78,3556.5 3408.78,3517.57 3336,3444.79 3336,3366 3375.9,3326.1 U1.27
  Bottom Layer w10: v1(2975,3969) 3152,3969 v1(3414,3707)
Boot: *.25 R3.1 SW1.3 | length 1749.4
  Top Layer w10: SW1.3 2202.05,4558.97 2299.13,4461.89 R3.1 ; R3.1@2287.05,4456.42 2560,4183.47 2560,3235 2580,3215 *.25
EN: *.3 C2.2 R4.1 SW2.1 | length 1818.5
  Top Layer w10: R4.1 1699.57,3767.57 1765.59,3833.59 C2.2 1860,3860 ; v1(1860,3950) 1860,3860 ; *.3 1880,3765 1860,3785 1860,3860
  Bottom Layer w10: v1(1860,3950) 1860,4015 2692.52,4847.52 2692.52,4854.05 2718.47,4880 SW2.1@2725,4880
ETH.RX_N: C18.1 R22.2 U1.5 | length 1633.1
  Top Layer w5: U1.5 3252.47,3424.53 3588.5,3088.5 3588.5,3041.5 3615,3015 v1(3680,3015) ; C18.1 3743.32,3411.33 3743.32,3386.68 3770.35,3359.65 3892.65,3359.65 ; v1(3851,3130) 3851,3318 3892.65,3359.65 ; R22.2 4089.61,3415 4065,3415 4031,3381 3914,3381 3892.65,3359.65
  Bottom Layer w5: v1(3680,3015) 3795,3130 v1(3851,3130)
ETH.RX_P: C15.1 R21.2 U1.6 | length 817
  Top Layer w5: v1(3110.65,3708) 3064,3754.65 C15.1 3030,3690 2985,3645 2985,3495 3075.16,3404.84 U1.6 ; v1(3304.61,3708) R21.2
  Bottom Layer w5: v1(3110.65,3708) v1(3304.61,3708)
ETH.TX_N: B1.2 J2.3 R17.1 U1.1 | length 1421.1
  Top Layer w5: B1.2 2916.69,3695 2933.33,3695 2935.83,3692.5 v1(2957.5,3692.5) ; U1.1 3131.99,3503.27 3135,3506.28 v1(3135,3620) 3189,3674 3360,3674 3381,3695 3381,3760 3461,3840 v1@3465,3840 ; J2.3 3558.76,4230.57 3558.76,4213.41 3560,4212.17 3560,4027.18 ; v1(3560,3985) 3560,4027.18 ; R17.1 3620.79,4019.21 3614.98,4025.02 3612.82,4027.18 3560,4027.18
  Bottom Layer w5: v1(2957.5,3692.5) 2957.5,3691.15 3028.65,3620 v1(3135,3620) ; v1(3469.12,3842.86) 3560,3933.74 v1(3560,3985)
ETH.TX_P: B1.1 J2.1 R16.1 U1.2 | length 1705.3
  Top Layer w5: R16.1 2840,3615 2860,3595 ; v1(2860,3520) 2860,3595 ; B1.1 2903.31,3595 2870,3595 ; v1(3020,3525) 3061.42,3483.58 U1.2 ; J2.1 3612.33,4277 3420,4277 3399,4256 3399,4208 3364,4173 3364,4128.32 3145.68,3910 3000,3910 2870,3780 2870,3595 ; 2860,3595 2870,3595
  Bottom Layer w5: v1(2860,3520) 2862.5,3522.5 3017.5,3522.5 v1(3020,3525)
ETHA3V3: C4.1 C5.1 C6.1 C7.1 C8.1 C10.1 C11.1 FB1.2 U1.4 U1.8 U1.11 U1.15 U1.17 U1.21 | length 2936.7
  Top Layer w10: U1.11 3120.95,3305.91 3175.91,3305.91 3212.5,3342.5 ; U1.8 3189.53,3365.47 3212.5,3342.5 ; U1.4 3269.96,3444.21 3289.18,3425 v1(3300,3425) ; U1.15 3216.1,3265 3224.79,3273.69 3250,3273.69 3255.47,3268.21 ; v1(3250,3380) 3212.5,3342.5 ; U1.17 3255.47,3268.21 ; C11.1 C4.1 3519.41,1797 3523.82,1801.41 3523.82,1915 3524.15,1950 C7.1@3524.8,2020 ; C7.1@3524.8,2020.04 3525,2041.18 C6.1 C8.1 3525,2460 3545,2480 ; C10.1 3545,2480 ; 3212.5,3342.5 3240,3315 3255.47,3315 ; 3255.47,3268.21 3255.47,3315 ; 3255.47,3315 3290,3315 3334.21,3270.79 U1.21 3334.21,3039.07 3277.14,2982 FB1.2 3277.14,2596.86 3394,2480 3545,2480
  Bottom Layer w10: v1(3250,3380) 3252.5,3380 3297.5,3425 v1(3300,3425)
GND: *.1 *.15 *.38 *.39 C1.2 C2.1 C3.2 C4.2 C5.2 C6.2 C7.2 C8.2 C9.2 C10.2 C11.2 C12.2 C13.2 C14.1 C16.2 C17.1 C19.1 C20.1 C21.1 J1.1 R5.1 R6.1 R19.1 R20.1 SW1.2 SW2.4 U1.3 U1.9 U1.14 U1.16 U1.19 U1.29 U1.48 | length 3608.5
  Top Layer w10: v1(1625,3860) C2.1 ; *.15 1971.34,3170 v1(2035,3170) ; *.1 2015,3865 v1(2055,3905) ; v1(2205,3420) 2205,3496.97 2206.3,3498.27 2266.34,3498.27 2296.27,3498.27 2298.11,3500.11 2327.63,3500.11 2327.63,3528.37 2326.38,3529.62 2326.38,3558.31 2266.34,3558.31 2206.3,3558.31 2206,3558.31 2206,3593.7 2206.3,3594 2206.3,3618.35 2266.34,3618.35 2266.34,3620 2326.98,3620 *.39@2327.63,3619.35 ; C1.2 2559.18,2330 2590.18,2361 v1(2611.93,2361) ; C12.2 2565.03,2145.03 2605.03,2185.03 v1(2622.28,2185.03) ; *.38 v1(2749.53,3865) ; C16.2 v1(2805,2670) ; v1(2760,3340) 2831.33,3340 R19.1 ; R5.1 v1(2879.57,3016.58) ; v1(2934.13,2703.42) R6.1 ; R20.1@2940,4339.17 3079.14,4339.17 3085,4333.31 3085,4270.09 v1(3084.25,4269.34) ; v1(2985,3410) 3049.21,3345.79 U1.9 ; C9.2 v1@3083.59,4270 ; U1.3 3168.07,3463.9 3184.18,3480 v1(3195,3480) 3195,3490.82 3176.73,3509.09 U1.48 ; U1.14 3196.93,3229.92 3196.93,3193.07 3231.1,3158.9 v1@3235.79,3158.9 ; U1.16 3236.3,3229.92 3236.3,3159.41 v1@3235.79,3158.9 ; v1(3240,3150) 3240,3158.9 3253.99,3158.9 3294.33,3199.24 3294.33,3229.92 U1.19 ; v1@3240,3154.69 v1@3235.79,3158.9 ; C20.1 3380,3070 v1(3380,2930) 3463.43,2930 C19.1 ; v1(3388.86,3375.47) 3388.86,3371.62 3395,3365.47 U1.29 ; C4.2 3617.18,1685 3632.18,1700 v1(3661.93,1700) ; C6.2 3624.77,2165 3635.77,2176 v1(3667.52,2176) ; C8.2 3606.27,2310 v1@3654.27,2358 ; C5.2 3651.59,1880 3676.34,1904.75 v1(3676.34,1938) ; C7.2@3595.59,2020 3651.93,2020 3676.93,2045 v1(3676.93,2077) ; C10.2 3685.34,2480 v1(3721.34,2516) ; v1@3644.27,2363 v1(3657.52,2363) ; v1(3975,3220) 4035.44,3220 C21.1 ; C17.1 4199.14,3795 4205,3800.86 C14.1
  other v1: 4205,3915
LINK: R15.2 U1.25 | length 901.1
  Top Layer w10: U1.25 3509.73,3286.73 v1(3510,3287) ; v1(3775,3910) 3775,3899.18 3795,3879.18 R15.2
  Bottom Layer w10: v1(3510,3287) 3475,3322 3475,3523.72 3505,3553.72 3505,3640 v1(3775,3910)
Net*_6: "adc connections.1" *.6 | length 1406.8
  Top Layer w10: 1483.27,4658.03 1565,4576.3 1565,3737 1687,3615 *.6
Net*_7: "DUT connections.7" *.7 | length 2675.8
  Top Layer w10: 1255,1469.65 1203,1521.65 1203,3216 v1(1552,3565) ; v1(1885,3565) *.7
  Bottom Layer w10: v1(1552,3565) v1(1885,3565)
Net*_10: "DUT connections.5" *.10 R1.1 | length 2232.2
  Top Layer w10: 1255,1800.35 1255,3090 1625,3460 v1(1630,3460) 1630,3514.57 R1.1 ; v1(1870,3410) 1961.34,3410 *.10
  Bottom Layer w10: v1(1630,3460) 1680,3410 v1(1870,3410)
Net*_11: "DUT connections.6" *.11 R2.1 | length 2230.5
  Top Layer w10: 1255,1635 1255,1697 1630,2072 v1@1630,3270.17 ; v1(1630,3268) R2.1 ; v1(1870,3345) 1880.82,3345 1900.82,3365 *.11
  Bottom Layer w10: v1@1624.76,3264.94 1626.94,3264.94 1707,3345 v1(1870,3345)
Net*_13: "adc connections.7" *.13 U1.35 | length 3470.5
  Top Layer w10: 1266.73,4327.32 1215,4275.59 1215,4065 1680,3600 1824.14,3600 1830,3594.14 1830,3270.86 1835.86,3265 *.13 v1(2026,3265) ; U1.35 v1(3555,3483.58)
  Bottom Layer w10: v1(2026,3265) 2039,3252 3527,3252 3555,3280 v1(3555,3483.58)
Net*_16: "adc connections.6" *.16 U1.34 | length 3526.5
  Top Layer w10: v1(1855,3130) 1865.82,3130 1880.82,3115 *.16 ; v1(3385,3440) 3385,3441.66 3407.23,3463.9 U1.34
  Bottom Layer w10: 1266.73,4492.68 1342,4417.41 1342,4218 1924,3636 2040,3636 2075,3601 2075,3338 2040,3303 ; v1(1855,3130) 1855,3228 1930,3303 2040,3303 ; v1(3385,3440) 3235,3290 2655,3290 2642,3303 2040,3303
Net*_19: *.19 U1.32 | length 2436.8
  Top Layer w10: *.19 2033,2965 v1(2141,2857) ; U1.32 3595.63,3424.53 3724,3296.16 3724,3120 3704,3100 v1(3621,3100)
  Bottom Layer w10: v1(2141,2857) 3068,2857 3200,2989 3547,2989 3621,3063 v1(3621,3100)
Net*_20: "adc connections.5" *.20 U1.33 | length 4166.1
  Top Layer w10: v1(2149,4375) 2149,3351 2535,2965 *.20 v1(2735,2965) ; U1.33 3625.79,3444.21 v1(3634,3436)
  Bottom Layer w10: 1266.73,4658.03 1357.76,4567 1957,4567 v1(2149,4375) ; v1(2735,2965) 2988,3218 3612,3218 3634,3240 v1(3634,3436)
Net*_23: *.23 R5.2 | length 515.2
  Top Layer w10: *.23 2774.5,3115 2823,3066.5 2823,2905.86 2828.86,2900 2944.58,2900 2950.43,2905.86 R5.2
Net*_24: *.24 R6.2 | length 620.8
  Top Layer w10: *.24 2810,3165 3005,2970 R6.2
Net*_30: *.30 U1.37 | length 786
  Top Layer w10: *.30 v1(2735,3465) ; v1(3285,3490) 3354.38,3490 3392.76,3528.38 3392.76,3559.05 U1.37
  Bottom Layer w10: v1@2758.51,3457.35 3007.65,3457.35 3045,3420 3123,3420 3124,3421 3216,3421 v1(3285,3490)
Net*_31: *.31 U1.36 | length 839.1
  Top Layer w10: *.31 2685,3525 v1(2770,3525) ; v1(3443.78,3542) 3443.78,3503.78 3444.29,3503.27 U1.36
  Bottom Layer w10: v1(2770,3525) 2805,3560 3414.96,3560 3432.96,3542 v1(3443.78,3542)
Net*_34: *.34 J1.3 | length 1881.1
  Top Layer w10: *.34 2686.81,3665 2699.53,3677.72 2699.53,3681.43 2705.39,3687.28 2708.67,3687.28 2714.53,3693.14 2714.53,3696.43 2760,3741.9 2760,3780 2815,3835 v1(2815,4015)
  Bottom Layer w10: v1(2815,4015) 3002,4202 3905.44,4202 J1.3
Net*_35: *.35 J1.2 | length 3084
  Top Layer w10: v1(2615,3715) *.35
  Bottom Layer w10: v1(2615,3715) 2615,4130 3032,4547 3032,4912 3055,4935 3860,4935 3890,4905 3890,4486.86 3895.86,4481 4145.56,4481 J1.2
NetB2_1: B2.1 C15.2 J2.5 | length 851.3
  Top Layer w10: C15.2 3039.65,3845 3145,3845 3265,3965 3441.62,3965 3499.17,3907.44 ; J2.5 3499.17,3907.44 ; B2.1 3499.17,3907.44
NetB2_2: B2.2 C18.2 J2.7 | length 976.3
  Top Layer w10: v1(3495,3750) 3505.82,3750 3516.61,3739.22 3520.78,3739.22 3545.45,3714.55 ; B2.2 3550,3719.09 3545.45,3714.55 ; C18.2 3820.35,3457.65 3799.35,3478.65 3781.35,3478.65 3545.45,3714.55
  Bottom Layer w10: J2.7 3399.17,3845.83 v1(3495,3750)
NetC9_1: C9.1 J2.8 J2.S1 J2.S2 R20.2 | length 1337.7
  Top Layer w10: C9.1 2885.86,4270 2880,4275.86 2880,4364.97 2885.86,4370.83 R20.2 ; R20.2@2948.62,4371.62 2950.16,4370.08 J2.S2 3169.25,4270.08 J2.8 ; C9.1@2959.63,4285.37 C9.1@2959.63,4285.46
  Bottom Layer w10: J2.S2 J2.S1
NetC14_2: C14.2 J2.2 R14.2 | length 641.9
  Top Layer w10: J2.2 v1@3665,4140.16 ; v1@3905,4135 3907.9,4132.1 R14.2 4204.14,4132.1 4210,4126.24 4210,4100 C14.2
  Bottom Layer w10: v1(3679,4143) 3684,4138 3904,4138 v1(3909,4133)
NetC16_1: C16.1 R18.2 U1.31 Y1.2 | length 1968.1
  Top Layer w10: Y1.2 2611,2685.71 2621.71,2675 2689.41,2675 C16.1 2694.41,2846 2770,2921.59 2770,3034.14 2772.35,3036.49 2772.35,3052.35 v1(2780,3060) ; U1.31 3540.09,3404.84 v1@3590,3354.93 ; v1(3590,3336) v1@3590,3354.93 ; R18.2 3615,3329.93 v1@3590,3354.93
  Bottom Layer w10: v1(2780,3060) 2845.83,3125.83 2845.83,3155.83 2924,3234 3564,3234 3590,3260 v1(3590,3336)
NetC17_2: C17.2 R18.1 U1.30 Y1.1 | length 2972.6
  Top Layer w10: Y1.1 2571.71,2524.29 v1(2572,2524) ; U1.30 3530.12,3385.16 3545.28,3370 3545.28,3220 3571.52,3193.75 R18.1 v1(3689,3193.75) ; v1(3968.18,3846.18) C17.2
  Bottom Layer w10: 2477,2519 3121,2519 3689,3087 v1(3689,3193.75) 3689,3567 v1(3968.18,3846.18)
NetC19_2: C19.2 U1.20 | length 555.7
  Top Layer w10: v1(3285,3055) 3285,3060.86 3314.53,3090.39 U1.20 ; C19.2 v1(3526.57,3026)
  Bottom Layer w10: v1(3285,3055) 3285,3049 3314,3020 3520.57,3020 v1(3526.57,3026)
NetC20_2: C20.2 U1.22 | length 119
  Top Layer w10: U1.22 3353.9,3191.1 3385,3160 C20.2
NetC21_2: C21.2 J2.6 R21.1 R22.1 | length 2193.9
  Top Layer w10: R21.1 3255.39,3801.39 v1@3324.5,3870.5 ; v1(3330,4015) 3449.17,4134.17 J2.6 ; v1(3844,4278) 3844,3827 4126,3545 4145,3545 4155,3535 4155,3370.86 4149.14,3365 4090.39,3365 R22.1 ; C21.2 R22.1@4090,3363.28
  Bottom Layer w10: v1(3325,3880) 3327.5,3882.5 3327.5,4012.5 v1(3330,4015) ; J2.6 3487.02,4278 v1(3844,4278)
NetJ2_9: J2.9 R15.1 | length 1058.4
  Top Layer w10: J2.9 3725.24,4640.24 3705.24,4640.24 3590,4525 3590,4426 3720,4296 3720,3800.47 3740,3780.47 R15.1
NetJ2_11: J2.11 R23.2 | length 958
  Top Layer w10: R23.2 3034.06,4102 3320,4102 3337,4119 3337,4180 3311.61,4205.39 3311.61,4372 3375,4435.39 3375,4644.14 3369.14,4650 J2.11
NetR19_2: R19.2 U1.10 | length 355.9
  Top Layer w10: R19.2 v1(2900,3405) ; v1(3017.43,3325.17) 3017.89,3325.64 3119.97,3325.64 U1.10
  Bottom Layer w10: v1(2900,3405) 2899.03,3404.03 2899.03,3335.86 2909.89,3325 3017.25,3325 v1(3017.43,3325.17)
pads on no net: "adc connections.2" "adc connections.3" "adc connections.4" "adc connections.8" "DUT connections.1" "DUT connections.2" "DUT connections.3" "DUT connections.4" "DUT connections.8" *.4 *.5 *.8 *.9 *.12 *.14 *.17 *.18 *.21 *.22 *.26 *.27 *.28 *.29 *.32 *.33 *.36 *.37 J2.4 J2.MH1 J2.MH2 SW1.1 SW1.4 SW2.2 SW2.3 U1.7 U1.12 U1.13 U1.18 U1.23 U1.24 U1.26 U1.38 U1.39 U1.40 U1.41 U1.42 U1.46 U1.47

## Polygon pours and split planes (outlines as drawn)
GND on GND (split plane): 4429.9,1020.1 1020.1,1020.1 1020.1,4979.9 4429.9,4979.9
3V3 on VDD (split plane): 4429.9,1020.1 1020.1,1020.1 1020.1,4979.9 4429.9,4979.9

## Text inside footprints (layer, text, board x,y; h text height)
C3: Top Overlay "+" at 2170.39,2185.47 h59.06
C11: Top Overlay "+" at 3619.8,1405.49 h59.06
C13: Top Overlay "+" at 2170.39,2520.47 h59.06